# Altium PCB cnc_60X70_PCB.PcbDoc (part 1 of 2)
Units mil, origin at the board's own origin, x right, y up, seen from the top; angles counter-clockwise.
Board outline 3602.36 x 2362.2 mil, 2 copper layers (Top Layer, Bottom Layer); 111 components, 89 nets, 384 pads, 132 vias.
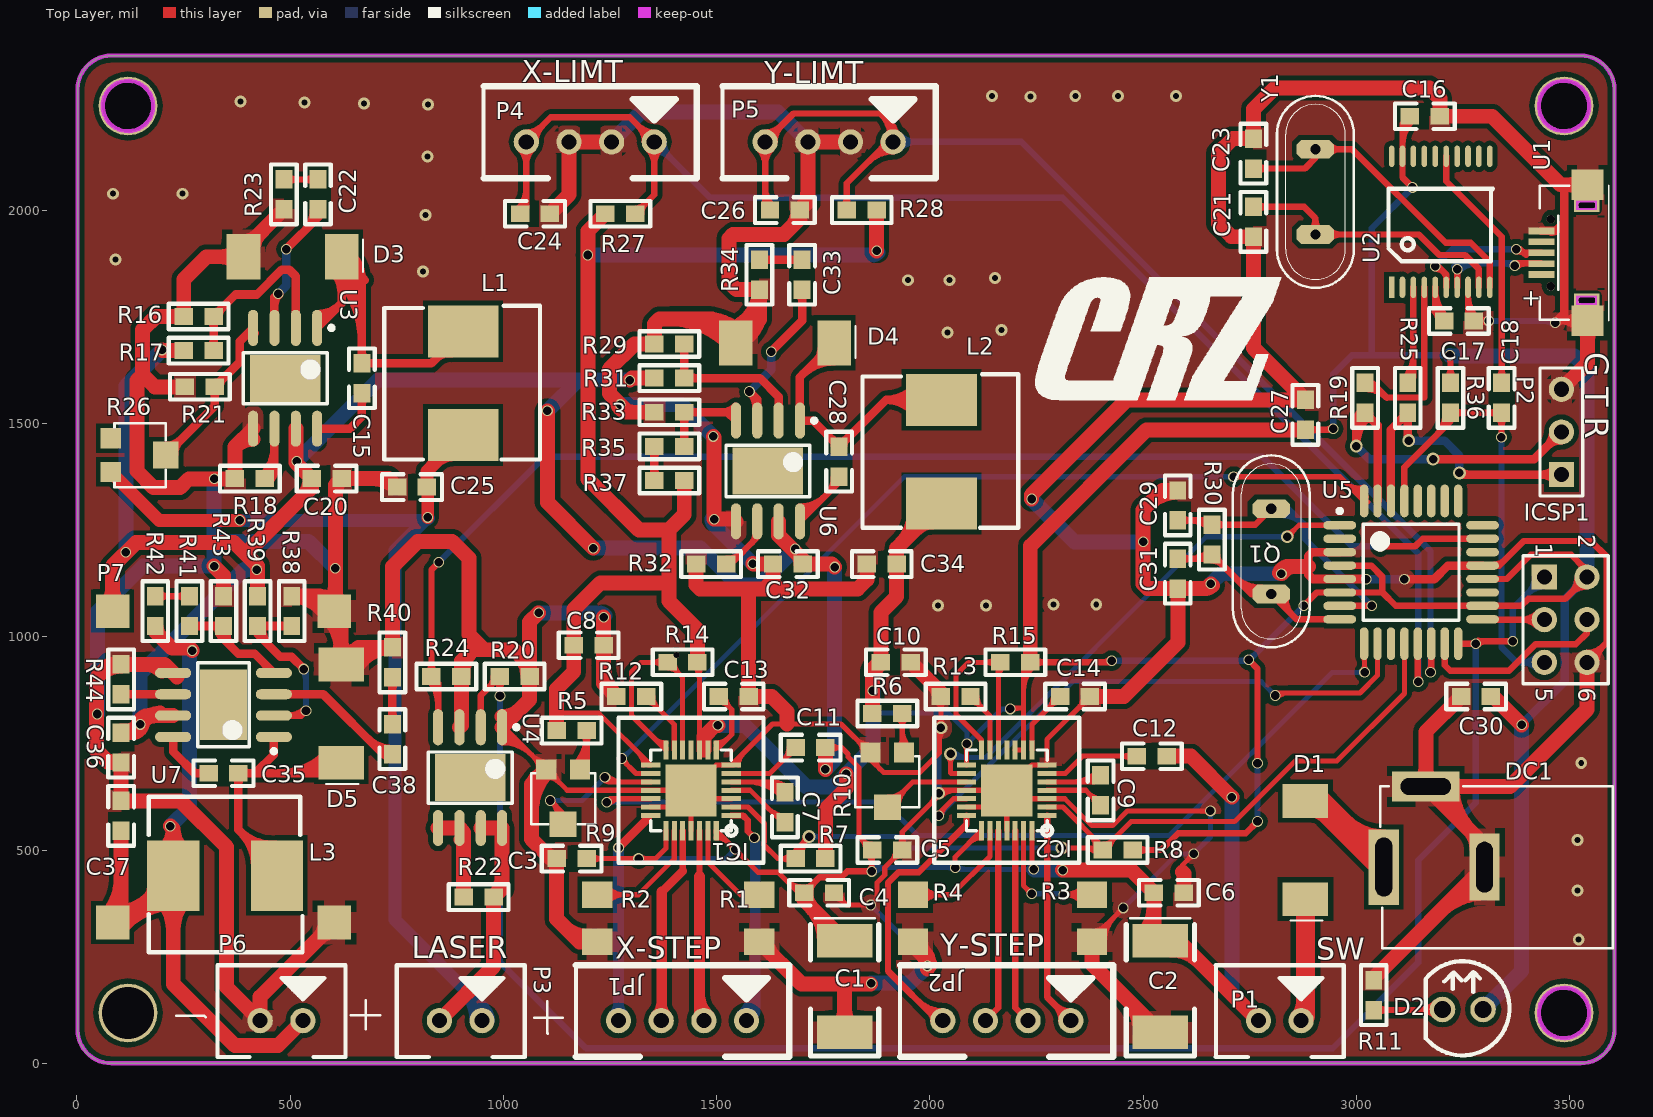
[diagram p0: Top Layer view]
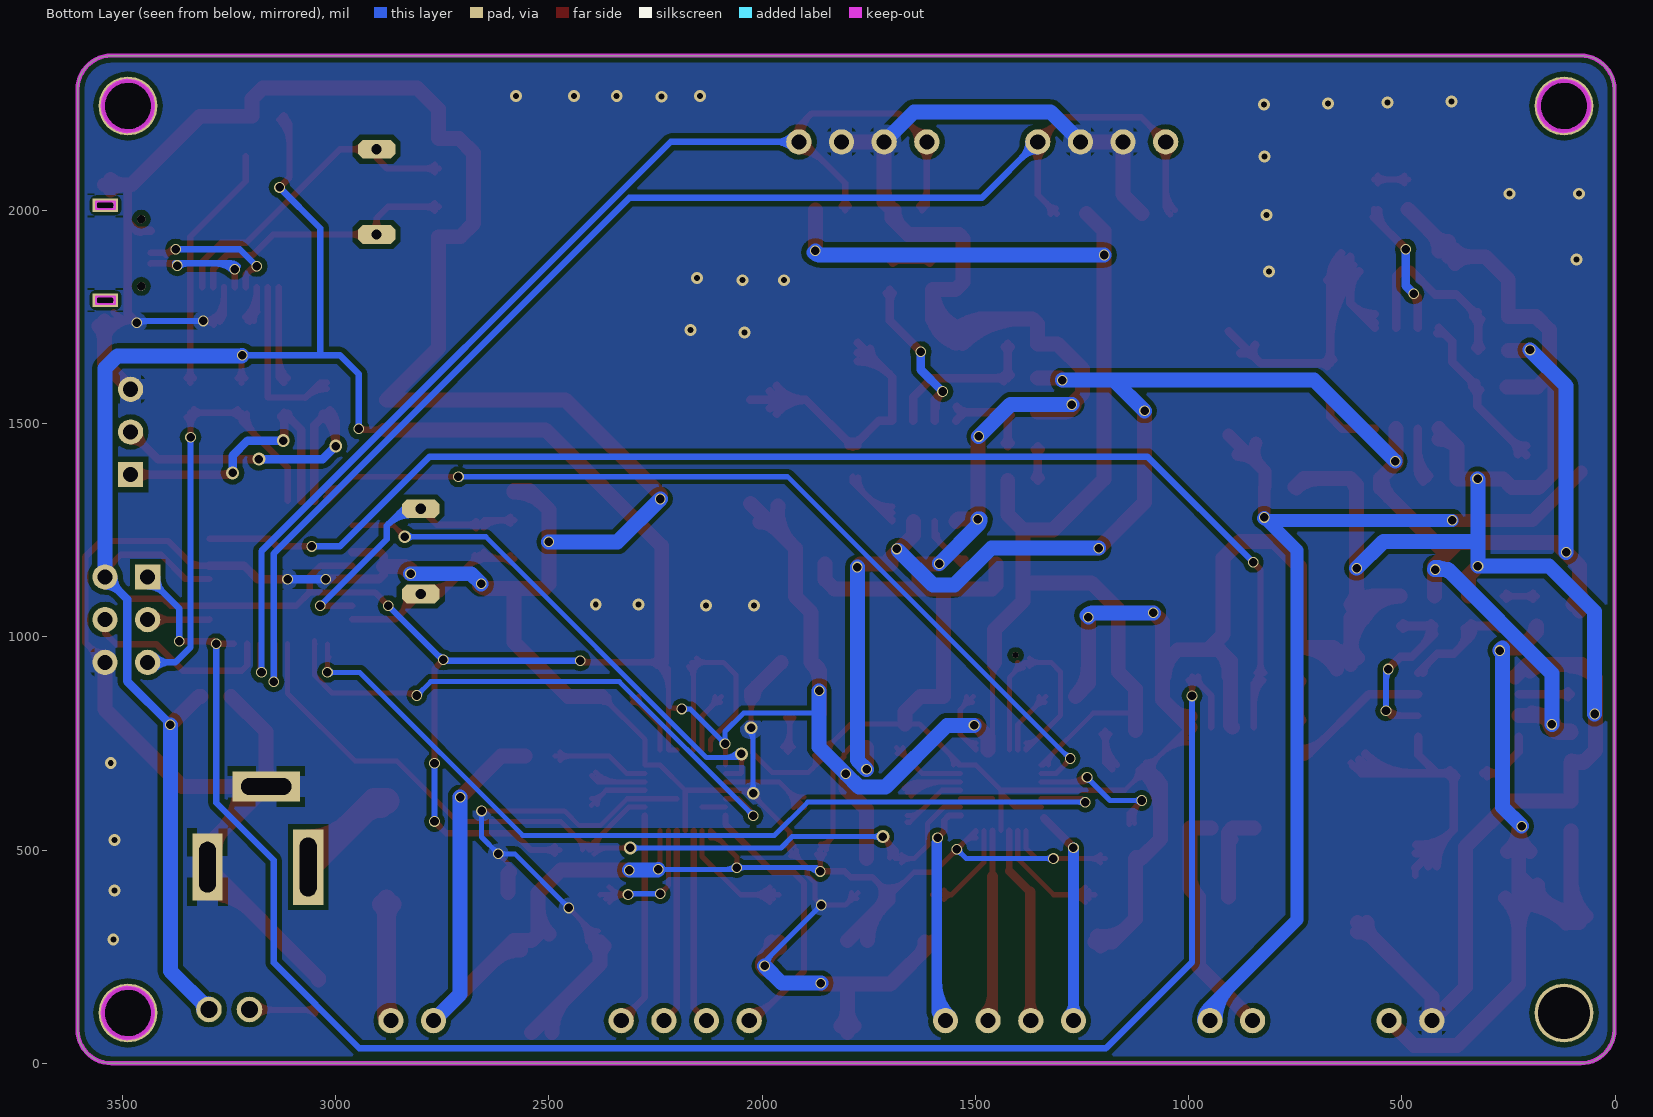
[diagram p1: Bottom Layer view, seen from below]

## Layer stack, top to bottom
Top Layer: signal copper 1.4
Dielectric: dielectric 12.6, FR-4, Dk 4.8
Bottom Layer: signal copper 1.4

## Board outline
1.97,78.74 ccw(c80.71,78.74) 80.71,0 3525.59,0 ccw(c3525.59,78.74) 3604.33,78.74 3604.33,2283.46 ccw(c3525.59,2283.46) 3525.59,2362.2 80.71,2362.2 ccw(c80.71,2283.46) 1.97,2283.46

## Design rules (kind name [scope] priority, off if disabled: settings)
Clearance [All] p1: gap=3.94
ComponentClearance [All] p1 off: gap=10 collisioncheckmode=3 verticalgap=10 showdistances=FALSE
FabricationTestpoint [(IsPad And (OnTopLayer Or OnBottomLayer))] p1: side=3 testpointundercomponent=TRUE minsize=40 maxsize=100 preferedsize=60 minholesize=0 maxholesize=40 preferedholesize=32 testpointgrid=1 allowsidetop=TRUE allowsidebottom=TRUE usegrid=TRUE gridtolerance=0.01
PlaneConnect [All] p1: planeconnectstyle=Relief reliefexpansion=20 reliefentries=4 reliefconductorwidth=50 reliefairgap=10
PolygonConnect [All] p1: connectstyle=Relief reliefconductorwidth=50 reliefentries=4 polygonreliefangle="90 Angle"
RoutingVias [All] p1: holewidth=20 width=25 viastyle="Through Hole" minholewidth=20 minwidth=25 maxholewidth=20 maxwidth=30
SilkToSilkClearance [All] p1: silktosilkclearance=1
SilkscreenOverComponentPads [All] p1: minsilkscreentomaskgap=10
SolderMaskExpansion [All] p1: expansion=4
Width Width_1 [InNetClass('POW')] p1: maxlimit=60 minlimit=12 preferedwidth=12
Width [All] p2: maxlimit=710 minlimit=12 preferedwidth=12
23 further rules are at their usual default settings.

## Components (designator, comment, footprint, x,y, rotation, side; value= is the part's Value field where it differs from the comment)
C1 "Cap Pol1" CD6032 1800,180 r270 top
C2 "Cap Pol1" CD6032 2540,180 r270 top
C3 "Cap" C0603 1160,480 r0 top
C4 "Cap" C0603 1740,400 r0 top
C5 "Cap" C0603 1900,500 r180 top
C6 "Cap" C0603 2560,400 r0 top
C7 "Cap" C0603 1660,600 r270 top
C8 "Cap" C0603 1200,980 r0 top
C9 "Cap" C0603 2400,640 r270 top
C10 "Cap" C0603 1920,940 r0 top
C11 "Cap" C0603 1720,740 r180 top
C12 "Cap" C0603 2520,720 r180 top
C13 "Cap" C0603 1540,860 r180 top
C14 "Cap" C0603 2340,860 r180 top
C15 "Cap" C0603 668.46,1605.79 r270 top
C16 "Cap" C0603 3160,2220 r180 top
C17 "Cap" C0603 3240,1740 r180 top
C18 "Cap" C0603 3340,1560 r270 top
C20 "50V" C0603 585.83,1370.63 r0 top
C21 "Cap" C0603 2758.15,1972.48 r90 top
C22 "Cap" C0603 565.51,2036.85 r90 top
C23 "Cap" C0603 2758.15,2132.48 r270 top
C24 "Cap" C0603 1074.13,1991.69 r0 top
C25 "Cap" C0603 785.83,1350.63 r180 top
C26 "Cap" C0603 1660,2000 r0 top
C27 "Cap" C0603 2880,1520 r270 top
C28 "Cap" C0603 1787.01,1410.24 r270 top
C29 "Cap" C0603 2580.91,1307.76 r90 top
C30 "Cap" C0603 3280,860 r0 top
C31 "Cap" C0603 2580.91,1147.76 r270 top
C32 "50V" C0603 1667.01,1170.24 r180 top
C33 "Cap" C0603 1700.16,1848.54 r90 top
C34 "Cap" C0603 1887.01,1170.24 r180 top
C35 "Cap" C0603 344.02,680.16 r180 top
C36 "50V" C0603 104.02,740.16 r270 top
C37 "Cap" C0603 104.02,580.16 r90 top
C38 "Cap" C0603 740,760 r90 top
D1 "1N5824" SS34 2880,500 r270 top
D2 "LED3" LED 3296.42,126.22 r180 top
D3 "1N5824" SS34 505.83,1890.63 r0 top
D4 "1N5824" SS34 1660.16,1688.54 r0 top
D5 "1N5824" SS34 620,820 r270 top
DC1 "DC插座" DC座 3300,460 r180 top
IC1 "A4988" QFN28ET 1440,640 r180 top
IC2 "A4988" QFN28ET 2180,640 r180 top
ICSP1 "Header 3X2" HDR2X3 3440,1140 r270 top
JP1 "X-OUT" XH-2.54-4 1420,100 r180 top
JP2 "Y-OUT" XH-2.54-4 2180,100 r180 top
L1 "Inductor" L_1584 905.83,1610.63 r90 top
L2 "Inductor" L_1584 2027.01,1450.24 r90 top
L3 "Inductor" L_1584 364.02,440.16 r0 top
P1 "Header 2" XH-2.54-2 2820,100 r180 top
P2 "SERIAL" HDR1X3 3480,1380 r90 top
P3 "LASER" XH-2.54-2 900,100 r180 top
P4 "X-LMT" XH-2.54-4 1203.7,2160 r180 top
P5 "Y-LMT" XH-2.54-4 1763.7,2160 r180 top
P6 "PRO-POW" XH-2.54-2 480,100 r180 top
P7 "PRO_POW_MODULE" mp1584module 84.02,1060.16 r270 top
Q1 "16MHz" QS 2800,1200 r90 top
R1 "Res2" 1206 1600,340 r270 top
R2 "Res2" 1206 1220,340 r270 top
R3 "Res2" 1206 2380,340 r270 top
R4 "Res2" 1206 1960,340 r270 top
R5 "Res2" R0603 1160,780 r180 top
R6 "Res2" R0603 1900,820 r180 top
R7 "Res1" R0603 1720,480 r0 top
R8 "Res1" R0603 2440,500 r0 top
R9 "RPot" 电位器 1140,560 r180 top
R10 "RPot" 电位器 1900,600 r180 top
R11 "Res3" R0603 3040,160 r90 top
R12 "Res2" R0603 1300,860 r0 top
R13 "Res2" R0603 2060,860 r0 top
R14 "Res2" R0603 1420,940 r0 top
R15 "Res2" R0603 2200,940 r0 top
R16 "Res1" R0603 285.83,1750.63 r0 top
R17 "Res1" R0603 285.83,1670.63 r0 top
R18 "Res1" R0603 405.83,1370.63 r0 top
R19 "Res2" R0603 3020,1560 r90 top
R20 "Res1" R0603 1026.46,906.65 r0 top
R21 "Res2" R0603 288.46,1585.79 r0 top
R22 "Res2" R0603 942.01,389.68 r180 top
R23 "Res1" R0603 485.51,2036.85 r90 top
R24 "Res1" R0603 866.46,906.65 r0 top
R25 "Res2" R0603 3120,1560 r270 top
R26 "RPot" 电位器 208.46,1425.79 r270 top
R27 "Res2" R0603 1274.13,1991.69 r180 top
R28 "Res2" R0603 1840,2000 r0 top
R29 "Res1" R0603 1389.06,1686.18 r0 top
R30 "Res2" R0603 2660.91,1227.76 r270 top
R31 "Res1" R0603 1389.06,1606.18 r0 top
R32 "Res1" R0603 1487.01,1170.24 r0 top
R33 "Res1" R0603 1389.06,1526.18 r0 top
R34 "Res1" R0603 1600.16,1848.54 r90 top
R35 "Res1" R0603 1389.06,1446.18 r0 top
R36 "Res2" R0603 3220,1560 r90 top
R37 "Res1" R0603 1389.06,1366.18 r180 top
R38 "Res1" R0603 504.02,1060.16 r270 top
R39 "Res1" R0603 424.02,1060.16 r270 top
R40 "Res1" R0603 740,940 r270 top
R41 "Res1" R0603 264.02,1060.16 r270 top
R42 "Res1" R0603 184.02,1060.16 r90 top
R43 "Res1" R0603 344.02,1060.16 r270 top
R44 "Res1" R0603 104.02,900.16 r270 top
U1 "USB" MICRO-USB 3520,1900 r90 top
U2 "CH340T" SSOP-20 3080,1820 r90 top
U3 "MP1584" SOIC127P720X170-8N 488.46,1605.79 r270 top
U4 "7341" SOIC127P720X170-8N 922.01,669.68 r270 top
U5 "ATMEGA328_20AU" TQFP32 3127.83,1151.02 r0 top
U6 "MP1584" SOIC127P720X170-8N 1620.16,1388.54 r270 top
U7 "MP1584" SOIC127P720X170-8N 344.02,840.16 r180 top
Y1 "12M" QS 2903.46,2042.76 r90 top

## Footprints (in the part's own frame and the unit in brackets; to place one, negate y for a bottom-side part, rotate by r counter-clockwise, add the part's x,y. Pads: shape width x height; smd on the part's side, far side on the other; paste and mask are expansions set on the pad)
1206 [mm]
  rect 1.6x1.8 smd: 1(-1.4,0) 2(1.4,0)
C0603 [mm]
  rect 1.1x1 smd: 1(-0.889,0) 2(0.889,0)
  silkscreen extent -1.78,-0.76 1.78,0.76
CD6032 [mm]
  rect 2x3.3 smd: 1(-2.73,0) 2(2.731,0)
  silkscreen extent -4.06,-2.03 4.13,2.03
DC座 [mm]
  rect 4x1.8 hole 1 slot 3 at 0 deg: 0(3.5,-4.8)
  rect 1.8x4 hole 1 slot 3 at 90 deg: 1(0,0)
  rect 1.8x4.5 hole 1 slot 3.5 at 90 deg: 2(6,0)
  silkscreen extent -7.62,-4.83 6.22,4.83
HDR1X3 [mm] "Connector; Header; 3 Position"
  rect 1.5x1.5 hole 0.9: 1(0,0)
  round 1.5 hole 0.9: 2(2.54,0) 3(5.08,0)
  silkscreen extent -1.27,-1.27 6.35,1.27
HDR2X3 [mm] "Connector; Header; 3x2 Position"
  rect 1.5x1.5 hole 0.9: 1(0,0)
  round 1.5 hole 0.9: 2(0,2.54) 3(2.54,0) 4(2.54,2.54) 5(5.08,0) 6(5.08,2.54)
  silkscreen extent -1.27,-1.27 6.35,3.81
L_1584 [mm]
  rect 3.1x4.2 smd: 1(-3.5,0) 2(2.667,0)
  silkscreen extent -4.95,-4.57 4.19,4.7
LED [mil]
  round 60 hole 40: 1(0,0) 2(95,0)
MICRO-USB [mm]
  rect 0.4x1.55 smd: 1(-1.3,2.2) 2(-0.65,2.2) 3(0,2.2) 4(0.65,2.2) 5(1.3,2.2)
  rect 1.8x1.9 smd: 6(-4.05,-0.55) 6(4.05,-0.55)
  rect 0.8x1.5 hole 0.4 slot 1 at 90 deg: 6(-2.825,-0.5) 6(2.825,-0.5)
  round 0.5 hole 0.5 unplated: ""(-2,1.65) ""(2,1.65)
  Keep-Out Layer lines w0.127: -3.054,0.075 -2.596,0.075 -2.596,-1.043 -3.054,-1.043 -3.054,0.075 ; 2.596,0.075 3.054,0.075 3.054,-1.043 2.596,-1.043 2.596,0.075
  silkscreen extent -4.05,-1.8 4,2.3
mp1584module [mm]
  rect 2x2 smd: 1(0,0) 2(18.542,0) 3(18.542,13.208) 4(0,13.208)
QFN28ET [mm]
  rect 1.15x0.3 smd: 1(-2.4,1.5) 2(-2.4,1) 3(-2.4,0.5) 4(-2.4,0) 5(-2.4,-0.5) 6(-2.4,-1) 7(-2.4,-1.5) 15(2.4,-1.5) 16(2.4,-1) 17(2.4,-0.5) 18(2.4,0) 19(2.4,0.5) 20(2.4,1) 21(2.4,1.5)
  rect 0.3x1.15 smd: 8(-1.5,-2.4) 9(-1,-2.4) 10(-0.5,-2.4) 11(0,-2.4) 12(0.5,-2.4) 13(1,-2.4) 14(1.5,-2.4) 22(1.5,2.4) 23(1,2.4) 24(0.5,2.4) 25(0,2.4) 26(-0.5,2.4) 27(-1,2.4) 28(-1.5,2.4)
  rect 3.048x3.099 smd: EXP(0,0)
  silkscreen extent -4.32,-4.32 4.32,4.32
QS [mil]
  oct 44x88 hole 24: 1(-100,0) 2(100,0)
  silkscreen extent -225,-90 225,90
R0603 [mm]
  rect 1.1x1 smd: 1(-0.889,0) 2(0.889,0)
  silkscreen extent -1.78,-0.76 1.78,0.76
SOIC127P720X170-8N [mm] "SOIC, 8-Leads, Body 5.0x2.6mm (max), Pitch 1.27mm, IPC Medium Density"
  rect 2.8x4.2 smd: 0(0,0)
  oval 2.15x0.6 smd: 1(-3,1.905) 2(-3,0.635) 3(-3,-0.635) 4(-3,-1.905) 5(3,-1.905) 6(3,-0.635) 7(3,0.635) 8(3,1.905)
  silkscreen extent -3.12,-2.5 1.53,2.88
SS34 [mm]
  rect 2x2.7 smd: 1(-2.921,0) 2(2.921,0)
  silkscreen extent 4.19,-0.89 4.19,1.02
SSOP-20 [mm]
  rect 1.27x0.33 smd: 1(-0.025,-0.051)
  oval 1.27x0.33 smd: 2(-0.025,-0.701) 3(-0.025,-1.351) 4(-0.025,-2.001) 5(-0.025,-2.651) 6(-0.025,-3.301) 7(-0.025,-3.951) 8(-0.025,-4.601) 9(-0.025,-5.251) 10(-0.025,-5.901) 11(7.775,-5.901) 12(7.775,-5.251) 13(7.775,-4.601) 14(7.775,-3.951) 15(7.775,-3.301) 16(7.775,-2.651) 17(7.775,-2.001) 18(7.775,-1.351) 19(7.775,-0.701) 20(7.775,-0.051)
  silkscreen extent 1.52,-6.1 5.84,0.13
TQFP32 [mm] "Thin QFP, 32-Leads, Body 7x7mm, Pitch 0.8mm, IPC Low Density"
  oval 1.95x0.5 smd: 1(-4.25,2.8) 2(-4.25,2) 3(-4.25,1.2) 4(-4.25,0.4) 5(-4.25,-0.4) 6(-4.25,-1.2) 7(-4.25,-2) 8(-4.25,-2.8) 17(4.25,-2.8) 18(4.25,-2) 19(4.25,-1.2) 20(4.25,-0.4) 21(4.25,0.4) 22(4.25,1.2) 23(4.25,2) 24(4.25,2.8)
  oval 0.5x1.95 smd: 9(-2.8,-4.25) 10(-2,-4.25) 11(-1.2,-4.25) 12(-0.4,-4.25) 13(0.4,-4.25) 14(1.2,-4.25) 15(2,-4.25) 16(2.8,-4.25) 25(2.8,4.25) 26(2,4.25) 27(1.2,4.25) 28(0.4,4.25) 29(-0.4,4.25) 30(-1.2,4.25) 31(-2,4.25) 32(-2.8,4.25)
  silkscreen extent -4.37,-2.85 2.85,3.77, body extent -3.5,-3.5 3.5,3.5, height 1.2
XH-2.54-2 [mm]
  round 1.5 hole 0.9: 1(-1.27,0) 2(1.27,0)
  silkscreen extent -3.81,-3.3 3.81,2.16
XH-2.54-4 [mm]
  round 1.5 hole 0.9: 1(-3.81,0) 2(-1.27,0) 3(1.27,0) 4(3.81,0)
  silkscreen extent -6.35,-3.3 6.35,2.16
电位器 [mm]
  rect 1.2x1.2 smd: 1(-1,-3.275) 2(1,-3.275)
  rect 1.6x1.524 smd: 3(0,0)
  silkscreen extent -1.91,-3.05 1.9,0

## Part data
C1 C2: "Polarized Capacitor (Radial)"
C3 C4 C5 C6 C7 C8 C9 C10 C11 C12 C13 C14 C15 C16 C17 C18 C21 C22 C23 C24 C25 C26 C27 C28 C29 C30 C31 C33 C34 C35 C37 C38: "Capacitor"
C20 C32 C36: library part Cap, "Capacitor"
D1 D3 D4 D5: library part "Diode 1N4007", "1 Amp General Purpose Rectifier"
D2: "Typical BLUE SiC LED"
ICSP1: "Header, 3-Pin, Dual row"
JP1 JP2 P4 P5 P7: library part "Header 4", "Header, 4-Pin"
P1: "Header, 2-Pin"
P2: library part "Header 3", "Header, 3-Pin"
P3 P6: library part "Header 2", "Header, 2-Pin"
Q1: library part XTAL/S
R1 R2 R3 R4 R5 R6 R7 R8 R11 R12 R13 R14 R15 R16 R17 R18 R19 R20 R21 R22 R23 R24 R25 R27 R28 R29 R30 R31 R32 R33 R34 R35 R36 R37 R38 R39 R40 R41 R42 R43 R44: "Resistor"
R9 R10 R26: "Potentiometer"
U1: library part MOLEX_MICRO_USB_AB_BOTTOM_MOUNT
U4: library part Component_1
U5: library part ATMEGA8_TQFP32, "Atmel Microcontroller - Library created by carel..  <www.mpfreezone.com>"
Y1: library part XTAL, "Crystal Oscillator"

## Free pads (board coordinates)
  round 137.8 hole 122.05: 0(120.08,2244.1) 1(3486.22,2244.1) 2(3486.22,118.11) 3(120.08,118.11)

## Via types
v1: diameter 25, hole 20, Top Layer to Bottom Layer, 93 vias
v2: diameter 28, hole 14, Top Layer to Bottom Layer, 28 vias
v3: diameter 30, hole 20, Top Layer to Bottom Layer, 10 vias
v4: diameter 14, hole 14, Top Layer to Bottom Layer, 1 vias

## Nets (pads, with @x,y where several pads share a name; then routed paths per layer and width w, separated by ;. In a path a pad name is that pad's centre, name@x,y a point inside that pad or via, vN(x,y) a via of type N, cw(c..) or ccw(c..) an arc to the next point about the centre after c; other vN are vias at no path point)
D+: U1.3 U2.6 | length 401.2
  Top Layer w15: v1@3184.06,1863.11 cw(c3184.06,1834.41) 3204.35,1854.7 ; v1(3184.06,1868.11) 3190.94,1868.11 3209.95,1849.1 U2.6@3209.95,1819 ; 3203.47,1855.59 cw(c3185.38,1837.51) U2.6@3210.96,1837.51 ; v1(3374.02,1908.46) 3383.86,1908.46 3392.32,1900 U1.3@3433.38,1900 ; v1@3374.42,1903.48 cw(c3376.74,1874.57) 3397.24,1895.08
  Bottom Layer w15: v1(3184.06,1868.11) 3224.41,1908.46 v1(3374.02,1908.46)
D-: U1.2 U2.7 | length 380.6
  Top Layer w15: U2.7@3235.54,1819 3235.54,1860.54 v1(3236.22,1861.22) ; 3235.54,1847.51 cw(c3249.93,1847.51) v1@3239.76,1857.68 ; v1(3371.06,1870.08) 3375.98,1875 3432.79,1875 U1.2@3433.38,1874.41 ; v1@3374.6,1866.54 cw(c3395.02,1846.13) 3395.02,1875
  Bottom Layer w15: v1@3229.15,1868.29 cw(c3245.34,1852.1) 3245.34,1875 ; v1(3236.22,1861.22) 3250,1875 3375.98,1875 v1(3371.06,1870.08) ; v1@3239.76,1857.68 cw(c3281.56,1815.88) 3281.56,1875 ; 3347.11,1875 cw(c3347.11,1846.13) v1@3367.53,1866.54
DIR-LASER: ICSP1.3 U5.17 | length 228.7
  Top Layer w15: U5.17@3295.16,1040.79 3295.94,1040 ICSP1.3@3440,1040 ; ICSP1.3@3424.42,1024.43 ccw(c3386.82,986.82) 3386.82,1040 ccw(c3386.82,1093.18) ICSP1.3@3424.42,1055.58
EN-LASER: ICSP1.1 R20.1 U4.2 U5.16 | length 4442.1
  Top Layer w15: U4.2@947.01,787.79 947.01,862.2 R20.1@991.46,906.65 992.13,905.98 v1(992.13,861.22) ; 967.3,882.49 ccw(c943.13,906.65) R20.1@977.3,906.65 ; R20.1@972.05,887.24 cw(c989.49,869.8) R20.1@989.49,894.47 ; R20.1@982.84,898.04 cw(c960.42,875.62) 992.13,875.62 ; 992.13,878.85 cw(c1019.26,878.85) R20.1@1000.07,898.04 ; U5.16@3238.07,983.7 v1(3278.98,983.7) 3285.43,990.16 3286.42,989.17 v1(3366.14,989.17) ; v1@3282.51,980.17 cw(c3304.26,958.42) 3304.26,989.17
  Bottom Layer w15: v1(992.13,861.22) 992.13,237.2 1193.9,35.43 2943.9,35.43 3144.68,236.22 3144.68,476.38 3278.98,610.67 v1(3278.98,983.7) ; v1(3366.14,989.17) 3366.14,1066.14 ICSP1.1@3440,1140 ; ICSP1.1@3417.97,1140 cw(c3364.79,1140) 3402.4,1102.4 cw(c3440,1064.79) ICSP1.1@3440,1117.97
EN-STEP: IC1.2 IC2.2 R7.1 R8.1 U5.12 | length 2595.1
  Top Layer w12: IC1.2@1534.48,600.63 1573.58,600.63 1612.08,562.13 1612.08,518.81 1611.22,517.95 1611.22,511.81 1643.03,480 R7.1@1685,480 1685,498.97 v3@1716.62,530.6 ; R7.1@1673.35,470.32 ccw(c1649.99,446.96) 1649.99,480 ccw(c1649.99,513.04) R7.1@1673.35,489.68 ; R7.1@1688.63,480.24 cw(c1727.49,485.93) 1699.72,513.7 ; R7.1@1700.51,481.98 cw(c1756.96,490.25) v3@1716.62,530.59 ; 1700.6,514.58 ccw(c1683.65,531.52) v3@1707.62,531.52 ; 1702.84,516.81 cw(c1716.62,503.03) v3@1716.62,522.52 ; v3(1716.62,531.52) v3@1716.62,530.6 ; IC2.2@2274.48,600.63 2311.77,600.63 R8.1@2405,507.4 ; v3(2309.06,504.92) 2402.52,504.92 R8.1@2405,507.4 ; v3@2315.42,498.56 cw(c2330.78,483.19) 2330.78,504.92 cw(c2330.78,526.65) v3@2315.42,511.29 ; 2358.12,504.92 cw(c2358.12,455.09) R8.1@2393.36,490.32 ; 2373.05,539.36 cw(c2333.69,500) R8.1@2389.35,500 ; 2381.87,504.92 ccw(c2381.87,521.16) R8.1@2393.36,509.68 ; R8.1@2393.53,518.87 cw(c2374.66,500) R8.1@2401.35,500 ; R8.1@2406.97,513.69 ccw(c2406.97,541.97) 2426.97,521.97 ; R8.1@2420.65,500 cw(c2458.44,500) 2431.72,526.72 ; U5.12@3112.09,983.7 3112.09,867.01 2953.74,708.66 2856.3,708.66 2714.1,566.46 2471.46,566.46 R8.1@2405,500 R8.1@2405,507.4
  Bottom Layer w12: v3(1716.62,531.52) 1929.11,531.52 1955.71,504.92 v3(2309.06,504.92) ; v3@1722.98,525.16 cw(c1738.35,509.79) 1738.35,531.52 cw(c1738.35,553.25) v3@1722.98,537.89 ; v3@2302.69,498.56 ccw(c2287.33,483.19) 2287.33,504.92 ccw(c2287.33,526.65) v3@2302.69,511.29
EXT-A6: U5.19
EXT-A7: U5.22
GND: C1.2 C2.2 C3.1 C4.2 C5.1 C6.2 C8.2 C10.2 C13.1 C14.1 C16.1 C17.1 C20.2 C21.1 C23.1 C24.2 C25.2 C26.2 C27.1 C29.2 C30.1 C31.2 C32.2 C34.2 C36.2 C37.2 D3.1 D4.1 D5.1 DC1.0 DC1.1 IC1.3 IC1.7 IC1.18 IC1.20 IC1.25 IC1.EXP IC2.3 IC2.7 IC2.18 IC2.20 IC2.25 IC2.EXP ICSP1.6 P2.3 P4.2 P4.3 P5.2 P5.3 P6.2 P7.3 P7.4 R1.2 R2.2 R3.2 R4.2 R9.2 R10.2 R11.2 R12.1 R13.1 R16.1 R18.1 R20.2 R21.1 R23.1 R24.2 R29.1 R32.1 R33.1 R34.1 R38.1 R40.1 R43.1 R44.1 U1.5 U1.6 U2.8 U3.5 U4.1 U4.3 U5.3 U5.5 U5.21 U6.5 U7.5 | length 28994.3
  Top Layer w12: U4.1@997.01,751.47 cw(c997.01,652.27) 1067.15,722.42 ; U4.1@997.01,763.47 cw(c997.01,693.24) 1046.66,742.9 ; U4.1@997.01,775.47 cw(c997.01,734.21) 1026.18,763.39 ; U4.1@997.01,787.47 cw(c997.01,775.19) U4.1@1005.69,783.87 ; U4.1@997.01,787.79 1001.77,787.79 R9.2@1100.63,688.94 1149.57,640 IC1.18@1345.51,640 IC1.EXP@1440,640 ; R9.2@1083.01,688.94 ccw(c1040.46,688.94) 1070.55,719.02 ccw(c1100.63,749.1) R9.2@1100.63,706.56 ; R9.2@1100.63,671.32 cw(c1100.63,628.77) 1130.71,658.85 cw(c1160.79,688.94) R9.2@1118.25,688.94 ; IC1.20@1345.51,600.63 1406.77,600.63 IC1.EXP@1440,633.86 ; IC1.25@1440,545.51 IC1.EXP@1440,633.86 ; IC1.EXP@1459.68,620.32 IC1.3@1534.48,620.32 ; IC1.7@1539.12,699.06 cw(c1550.32,699.06) 1542.4,706.97 ; IC1.7@1551.12,699.06 cw(c1591.29,699.06) 1562.88,727.46 ; C4.2@1775,400 1803.94,371.06 v1(1861.22,371.06) 1875.72,385.56 1875.72,423.53 1893.91,441.73 1893.91,458.91 C5.1@1935,500 1935,542.28 2020.77,628.05 v3(2020.77,632.9) 2020.77,638.88 2021.89,640 IC2.18@2085.51,640 IC2.EXP@2180,640 ; C4.2@1776.97,386.31 cw(c1776.97,358.03) 1796.97,378.03 ; C4.2@1790.65,400 ccw(c1828.44,400) 1801.72,373.28 ; 1825.51,761.11 ccw(c1860.63,796.23) R10.2@1860.63,746.56 ; 1832.63,753.98 cw(c1807.59,728.94) R10.2@1843.01,728.94 ; v1@1856.62,366.47 ccw(c1845.53,355.37) 1845.53,371.06 ccw(c1845.53,386.76) v1@1856.62,375.66 ; R10.2@1865.75,726.62 ccw(c1885.21,717.82) 1870.11,702.72 ; R10.2@1876.69,721.68 ccw(c1902.11,710.18) 1882.38,690.45 ; 1908.28,473.28 ccw(c1881.55,500) C5.1@1919.35,500 ; 1913.03,478.03 cw(c1933.03,458.03) C5.1@1933.03,486.31 ; C5.1@1925.32,509.68 ccw(c1901.96,533.04) 1935,533.04 ccw(c1968.04,533.04) C5.1@1944.68,509.68 ; 2001.97,609.26 ccw(c1978.32,632.9) v3@2011.77,632.9 ; R13.1@2015.32,850.32 cw(c1990.53,825.53) 2025.59,825.53 ; v3@2019.23,792.78 ccw(c2003.86,808.15) 2025.59,808.15 ccw(c2047.32,808.15) v3@2031.95,792.78 ; 2022.23,756.57 cw(c2055.44,756.57) v3@2031.95,780.05 ; v3@2022.23,783.06 2022.23,727.94 1976.38,682.09 1890.75,682.09 1860.63,712.21 R10.2@1860.63,728.94 1857.68,728.94 1791.34,795.28 1664.37,795.28 1630.7,795.28 IC1.7@1534.48,699.06 1499.06,699.06 IC1.EXP@1440,640 ; R13.1@2025,860 2025.59,859.41 v3(2025.59,786.42) ; 2025.59,828.39 cw(c2056.61,828.39) R13.1@2034.68,850.32 ; v3@2027.13,626.54 cw(c2059.62,594.05) 2059.62,640 ; IC2.20@2085.51,600.63 IC2.EXP@2140.63,600.63 ; IC2.25@2180,545.51 IC2.EXP@2180,640 ; IC2.EXP@2199.68,620.32 IC2.3@2274.48,620.32 2316.13,620.32 2379.36,557.09 2428.15,557.09 2462.6,591.54 v1(2657.48,591.54) ; 2348.28,833.28 ccw(c2321.56,860) C14.1@2359.35,860 ; 2353.03,838.03 cw(c2373.03,818.03) C14.1@2373.03,846.32 ; C14.1@2375,860 2274.48,759.48 IC2.7@2274.48,699.06 2239.06,699.06 IC2.EXP@2180,640 ; R3.2@2380,284.88 2380,291.42 v1(2452.76,364.17) ; R3.2@2383.94,310.38 ccw(c2383.94,346.66) 2409.59,321 ; R3.2@2397.43,284.88 cw(c2455.29,284.88) 2414.38,325.8 ; R3.2@2409.43,284.88 cw(c2496.26,284.88) 2434.86,346.28 ; v1@2446.26,364.17 cw(c2430.56,364.17) 2441.66,353.08 cw(c2452.76,341.98) v1@2452.76,357.67 ; 2591.54,448.82 2591.54,464.57 v1(2618.11,491.14) ; v1@2611.61,491.14 cw(c2595.92,491.14) 2607.01,480.05 cw(c2618.11,468.95) v1@2618.11,484.64 ; v1@2652.88,586.94 ccw(c2641.79,575.84) 2641.79,591.54 ccw(c2641.79,607.23) v1@2652.88,596.13 ; IC1.EXP@1440,633.86 IC1.EXP@1440,640
  Top Layer w15: 3261.13,1761.93 ccw(c3294.96,1761.93) C17.1@3271.04,1738.01 ; U2.8@3261.13,1798.14 ccw(c3331.18,1798.14) C17.1@3281.65,1748.62 ; U2.8@3261.13,1819 3261.13,1753.87 C17.1@3275,1740 3309.88,1740 v1(3310.04,1740.16) ; C17.1@3285.59,1731.38 cw(c3306.39,1710.58) 3306.39,1740 cw(c3306.39,1769.42) C17.1@3285.59,1748.62 ; U5.21@3295.16,1166.77 3334.09,1166.77 3391.73,1224.41 3549.21,1224.41 3586.83,1186.79 3586.83,986.83 ICSP1.6@3540,940 ; U5.21@3323.7,1169.11 ccw(c3323.7,1199.86) 3345.44,1178.12 ; v1(3465.55,1736.22) 3469.88,1740.55 U1.6@3541.65,1740.55 ; v1@3469.09,1732.68 cw(c3488.08,1713.69) 3488.08,1740.55 ; U1.6@3519.93,1720.8 ccw(c3472.25,1673.12) 3472.25,1740.55 ccw(c3472.25,1807.99) U1.6@3519.93,1760.3 ; ICSP1.6@3540,962.03 ccw(c3540,1015.21) 3577.6,977.6 ccw(c3615.21,940) ICSP1.6@3562.03,940
  Top Layer w20: U5.3@2960.51,1198.27 2896.1,1198.27 2886.81,1188.98 2886.81,1164.37 2886.81,1145.67 2897.2,1135.28 U5.5@2960.51,1135.28 3022.2,1135.28 v1(3022.64,1134.84) ; v1(3112.2,1134.84) 3182.09,1134.84 3214.02,1166.77 U5.21@3295.16,1166.77 ; U1.5@3433.38,1951.18 3466.3,1951.18 3486.22,1971.1 ; U1.5@3456.02,1949.05 ccw(c3456.02,1968.73) 3469.94,1954.82 ; v1@3469.88,1740.55 3486.22,1756.89 3486.22,1971.1 ; 3486.22,2052.17 3486.22,1971.1
  Top Layer w35: 52.3,909.59 cw(c104.01,857.87) R44.1@104.01,931.01 ; 62.07,717.46 ccw(c88.89,744.28) C36.2@103.19,709.15 ; 64.81,922.09 cw(c93.94,892.96) R44.1@103.51,933.03 ; 160.84,935.16 cw(c160.84,880.6) U7.5@199.42,919.18 ; U7.5@225.9,915.16 205.9,935.16 R44.1@104.01,935.16 77.88,935.16 46.26,903.54 46.26,733.27 74.37,705.16 C36.2@104.02,705.16 C37.2@104.01,615.16 243.11,615.16 351.38,506.89 351.38,178.62 P6.2@430,100 430,156.14 P7.3@604.02,330.16 ; U7.5@234.71,906.35 cw(c234.13,905.76) U7.5@234.93,905.56 ; R21.1@253.47,1585.79 182.91,1585.79 154.53,1614.17 ; v1(321.85,1165.35) 344.01,1143.19 R43.1@344.01,1095.16 ; R18.1@370.28,1370.08 v1(322.83,1370.08) 262.8,1370.08 242.13,1349.41 180.12,1349.41 140.75,1388.78 140.75,1600.39 154.53,1614.17 ; R18.1@370.83,1370.63 370.83,1445.04 U3.5@413.46,1487.68 ; 371.09,1445.3 cw(c413.46,1402.93) U3.5@413.46,1462.85 ; D3.1@375.36,1875.16 ccw(c338.03,1837.83) 338.03,1890.63 ccw(c338.03,1943.43) D3.1@375.36,1906.09 ; D3.1@390.83,1926.28 ccw(c390.83,1972.42) D3.1@423.46,1939.79 ; D3.1@412.7,1904.41 cw(c472.15,1904.41) 430.11,1946.45 ; R23.1@485.51,2001.85 390.83,1907.17 D3.1@390.83,1890.63 304.02,1890.63 250.83,1837.44 R16.1@250.83,1750.63 185.67,1750.63 154.53,1719.49 154.53,1614.17 ; P7.4@565.56,1095.16 cw(c565.56,1037.28) P7.4@615.3,1066.87 ; P7.3@582.15,330.16 cw(c529.35,330.16) 566.68,292.82 cw(c604.02,255.49) P7.3@604.02,308.29 ; P7.4@585.22,1048.98 ccw(c504.02,1000.68) R38.1@504.01,1095.16 569.01,1095.16 P7.4@604.02,1060.16 ; P7.4@588.55,1044.69 cw(c512.63,968.77) D5.1@620,968.77 ; P7.4@588.55,1075.62 ccw(c545.71,1118.47) 606.3,1118.47 ; D5.1@604.53,950.47 ccw(c567.2,987.8) 620,987.8 ccw(c672.8,987.8) D5.1@635.46,950.47 ; 606.3,1107.45 ccw(c651.31,1107.45) P7.4@619.48,1075.62 ; 606.3,1335.04 cw(c654.45,1335.04) C20.2@620.4,1369.09 ; D5.1@622.36,941.48 cw(c679.91,908.84) 679.91,975 ; D5.1@652.8,924.21 cw(c739.99,874.76) R40.1@740,975 ; D5.1@653.9,943.57 cw(c680.23,954.77) 660,975 ; 695.3,1370.63 cw(c695.3,1297.07) C25.2@747.31,1349.09 ; C25.2@750.83,1350.63 730.83,1370.63 C20.2@620.83,1370.63 606.3,1356.1 v1(606.3,1160.43) 606.3,1062.44 P7.4@604.02,1060.16 ; U4.3@897.01,787.79 901.46,792.24 R24.2@901.46,906.65 901.46,942.8 928.15,969.49 ; R24.2@905.6,906.86 cw(c983.42,914.22) 928.15,969.49 ; U4.1@997.01,787.79 1061.46,852.24 R20.2@1061.46,906.65 ; U4.1@997.01,812.62 ccw(c997.01,872.54) 1039.38,830.17 ; 1035.3,959.78 cw(c982.17,906.65) R20.2@1057.3,906.65 ; 1065.94,590.42 cw(c1199.14,590.42) R9.2@1104.96,684.61 ; 1065.94,639.89 cw(c1109.7,639.89) R9.2@1101.74,682.92 ; v1(1082.68,1056.1) 1061.46,1034.88 R20.2@1061.46,906.65 ; 1099.67,491.86 ccw(c1123.03,515.22) C3.1@1123.03,482.19 ; R9.2@1100.63,688.94 1065.94,654.25 1065.94,525.59 1111.53,480 C3.1@1125,480 1125,338.58 1178.7,284.88 R2.2@1220,284.88 ; C24.2@1109.13,1991.69 1153.7,2036.26 P4.3@1153.7,2160 P4.2@1253.7,2160 ; 1143.68,319.9 ccw(c1198.53,374.74) R2.2@1213.38,298.62 ; R2.2@1206.17,274.98 ccw(c1182.27,251.09) 1182.27,284.88 ccw(c1182.27,318.67) R2.2@1206.17,294.78 ; 1235,932.95 ccw(c1335.97,932.95) R12.1@1264.58,861.55 ; v1(1235,1046.02) C8.2@1235,980 1235,890 R12.1@1265,860 ; v1@1268.96,1542.5 ccw(c1292.72,1551.64) 1292.72,1526.18 ; v1@1270.09,1540.76 ccw(c1305.27,1575.94) 1305.27,1526.18 ; R33.1@1354.06,1526.18 1292.72,1526.18 ; 1389.14,1745.08 cw(c1389.14,1546.3) D4.1@1529.69,1686.86 ; R32.1@1452.01,1170.24 1452.01,1120.83 1460.63,1112.2 1575.79,1112.2 ; 1473.63,1745.08 cw(c1473.63,1630.8) D4.1@1554.44,1711.61 ; v1(1492.13,1469.49) 1494.09,1467.52 v1(1494.09,1275.59) 1540,1275.59 U6.5@1545.16,1270.43 ; 1495.51,1738.19 ccw(c1532.11,1774.79) D4.1@1541.28,1723.85 ; D4.1@1537.43,1722.78 ccw(c1503.14,1813.54) R34.1@1600.16,1813.54 ; D4.1@1547,1724.11 ccw(c1552.67,1791.03) 1600.16,1743.54 ; D4.1@1549.8,1690.04 ccw(c1522.27,1762.9) 1600.16,1762.9 ; v1(1584.65,1171.26) 1585.67,1170.24 C32.2@1632.01,1170.24 1632.01,1132.99 1611.22,1112.2 ; R1.2@1600,284.88 1698.86,186.02 v1@1860.24,186.02 ; R1.2@1617.93,284.88 ccw(c1661.23,284.88) R1.2@1630.61,254.27 ; 1664.37,795.28 1664.37,824.8 1629.17,860 C13.1@1575,860 1575,1111.42 1575.79,1112.2 ; 1674.08,1959.51 ccw(c1633.58,2000) C26.2@1690.85,2000 ; C26.2@1695.42,2001.54 ccw(c1651.3,2045.67) 1713.7,2045.67 ; C1.2@1784.54,87.96 ccw(c1747.2,125.3) 1800,125.3 ccw(c1852.8,125.3) C1.2@1815.47,87.96 ; C1.2@1800,72.5 1800,185.24 ; P5.2@1813.7,2160 P5.3@1713.7,2160 1713.7,2018.7 C26.2@1695,2000 1695,1980.43 1657.48,1942.91 1538.39,1942.91 1528.54,1933.07 1528.54,1831.69 1546.69,1813.54 R34.1@1600.16,1813.54 1600.16,1743.55 ; C34.2@1852.01,1170.24 1852.01,1133.5 1830.71,1112.2 1611.22,1112.2 ; C10.2@1955,940 2025,870 R13.1@2025,860 ; R4.2@1958.95,271.8 cw(c1939.52,220.81) v1@1994.09,220.81 ; R4.2@1960,284.88 1994.09,250.79 v1(1994.09,228.35) ; R4.2@1963.51,270.89 cw(c1962.55,239.36) v1@1994.09,239.36 ; R4.2@1977.93,284.88 ccw(c2021.23,284.88) R4.2@1990.61,254.27 ; R4.2@1986.76,258.12 cw(c1956.99,228.35) v1@1999.09,228.35 ; 2010.83,884.17 cw(c1986.67,860) R13.1@2020.85,860 ; v1(2238.19,1322.83) 2238.19,1332.68 2460.51,1555 C27.1@2880,1555 2758.15,1676.85 C21.1@2758.15,1937.48 2707.21,1937.48 2676.18,1968.5 2676.18,2133.86 2709.8,2167.48 C23.1@2758.15,2167.48 2758.15,2236.5 2807.95,2286.3 3170.39,2286.3 3195,2261.69 C16.1@3195,2220 3317.4,2220 3477.95,2059.45 U1.6@3541.65,2059.45 ; R3.2@2370.1,274.99 cw(c2346.21,251.09) 2380,251.09 cw(c2413.79,251.09) R3.2@2389.9,274.99 ; C14.1@2375,860 2454.49,860 2580.9,986.42 C31.2@2580.9,1112.76 ; R3.2@2380,284.88 2380,232.5 C2.2@2540,72.5 ; 2458.98,153.52 cw(c2377.96,72.5) C2.2@2492.54,72.5 ; 2511.71,1309.94 cw(c2580.9,1240.75) C29.2@2580.9,1338.6 ; 2526.34,1324.57 cw(c2568.19,1282.72) C29.2@2580.45,1340.62 ; C29.2@2580.9,1342.76 2544.53,1342.76 2499.02,1297.24 2499.02,1124.02 2510.27,1112.76 C31.2@2580.9,1112.76 ; 2591.54,448.82 2595,445.36 C6.2@2595,400 ; 2643.36,1112.76 ccw(c2643.36,1139.12) v1@2662,1120.48 ; v1(2658.46,1124.02) 2647.21,1112.76 C31.2@2580.9,1112.76 ; v1@2819.12,1149.34 cw(c2840.55,1141.57) 2840.55,1164.37 ; v1@2820.28,1151.17 cw(c2852.14,1119.31) 2852.14,1164.37 ; v1(2823.82,1147.64) 2840.55,1164.37 ; 2886.81,1164.37 2840.55,1164.37 ; R11.2@3040,195 3040,200 DC1.1@3300,460 3300,511.18 DC1.0@3162.2,648.98 ; DC1.0@3149.52,661.66 ccw(c3118.91,692.27) 3162.2,692.27 ccw(c3205.5,692.27) DC1.0@3174.89,661.66 ; DC1.0@3188.44,648.98 ccw(c3251.79,648.98) 3207,604.18 ; 3195.46,355.46 cw(c3300,250.91) DC1.1@3300,398.76 ; DC1.0@3218.19,636.29 cw(c3248.81,605.68) 3248.81,648.98 cw(c3248.81,692.27) DC1.0@3218.19,661.66 ; DC1.0@3223.44,648.98 ccw(c3371.29,648.98) 3266.75,544.43 ; C30.1@3245,860 3162.2,777.2 DC1.0@3162.2,648.98 ; 3255.21,415.2 cw(c3300,370.41) DC1.1@3300,433.76 ; 3263.82,547.36 cw(c3219.77,503.31) DC1.1@3282.07,503.31 ; P2.3@3480,1580 3541.65,1641.66 U1.6@3541.65,1740.55 ; U1.6@3527.01,2046.77 ccw(c3496.39,2016.16) 3496.39,2059.45 ccw(c3496.39,2102.74) U1.6@3527.01,2072.13 ; U1.6@3528.97,1727.87 cw(c3498.36,1697.26) 3541.65,1697.26 cw(c3584.95,1697.26) U1.6@3554.34,1727.87 ; ICSP1.6@3540,940 3540,829.37 3359.61,648.98 DC1.0@3162.2,648.98 ; P7.4@604.02,1060.16 620,1044.18 D5.1@620,935 660,975 ; 660,975 R40.1@740,975 ; R40.1@740,975 740,1164.21 799.21,1223.43 879.92,1223.43 919.29,1184.06 919.29,1004.92 954.72,969.49 ; 928.15,969.49 954.72,969.49 ; 954.72,969.49 1025.59,969.49 1061.46,933.62 R20.2@1061.46,906.65 ; 1292.72,1526.18 1249.02,1569.88 1249.02,1627.95 1307.24,1686.18 R29.1@1354.06,1686.18 1354.06,1732.99 1366.14,1745.08 1488.62,1745.08 D4.1@1545.16,1688.54 1600.16,1743.55 ; 1575.79,1112.2 1611.22,1112.2
  Bottom Layer w12: v1@1861.22,364.56 cw(c1861.22,348.87) 1872.32,359.97 cw(c1883.41,371.06) v1@1867.72,371.06 ; v1(1861.22,371.06) 1994.09,238.19 v1(1994.09,228.35) ; 1976.04,256.24 cw(c1948.14,228.35) v1@1987.59,228.35 ; v3@2014.4,639.27 ccw(c1999.04,654.63) 2020.77,654.63 ccw(c2042.5,654.63) v3@2027.13,639.27 ; v3(2020.77,632.9) v3@2020.77,781.59 ; 2020.77,753.05 cw(c2058.96,753.05) v3@2031.95,780.05 ; v1(2452.76,364.17) 2579.72,491.14 v1(2618.11,491.14) 2657.48,530.51 v1(2657.48,591.54) ; v1@2452.76,370.67 ccw(c2452.76,386.37) 2463.85,375.27 ccw(c2474.95,364.17) v1@2459.26,364.17 ; v1@2613.51,486.55 ccw(c2602.42,475.45) 2602.42,491.14 ccw(c2602.42,506.83) v1@2613.51,495.74 ; v1@2618.11,497.64 ccw(c2618.11,513.33) 2629.21,502.24 ccw(c2640.3,491.14) v1@2624.61,491.14 ; v1@2652.88,586.94 cw(c2641.79,575.84) 2657.48,575.84 cw(c2673.17,575.84) v1@2662.08,586.94
  Bottom Layer w15: v1(3310.04,1740.16) 3461.61,1740.16 v1(3465.55,1736.22) ; 3443.98,1740.16 cw(c3443.98,1714.64) v1@3462.02,1732.68
  Bottom Layer w20: v1(3022.64,1134.84) v1(3112.2,1134.84)
  Bottom Layer w35: v1(48.23,818.9) 48.23,1058.7 154.88,1165.35 v1(321.85,1165.35) 321.85,1369.09 v1(322.83,1370.08) ; 321.85,1223.43 543.31,1223.43 v1(606.3,1160.43) ; v1(1082.68,1056.1) 1224.92,1056.1 v1(1235,1046.02) ; 1222.74,1056.1 cw(c1222.74,1033.76) v1@1238.54,1049.56 ; P4.2@1253.7,2160 1324.02,2230.31 1643.39,2230.31 P5.3@1713.7,2160 ; v1(1273.62,1544.29) 1417.32,1544.29 v1(1492.13,1469.49) ; v1@1489.09,1275.59 ccw(c1510.29,1275.59) 1495.3,1260.6 ; v1(1494.09,1275.59) 1494.09,1261.81 v1(1584.65,1171.26) ; v1(1862.2,187.99) 1953.74,187.99 v1(1994.09,228.35) ; v1(2238.19,1322.83) 2338.58,1222.44 v1(2500,1222.44) ; v1(2658.46,1124.02) 2682.09,1147.64 v1(2823.82,1147.64)
  other v2: 3520.67,290.35 3517.72,405.51 3517.72,523.62 3526.57,703.74 2018.7,1072.83 2130.91,1072.83 2289.37,1075.79 2389.76,1075.79 2041.34,1712.6 2167.32,1719.49 1948.82,1835.63 2046.26,1835.63 2152.56,1840.55 812.01,1856.3 90.55,1883.86 817.91,1988.19 84.65,2038.39 248.03,2038.39 821.85,2125.98 822.83,2248.03 673.23,2250 533.46,2251.97 383.86,2254.92 2235.24,2265.75 2145.67,2267.72 2340.55,2267.72 2440.94,2267.72 2576.77,2267.72
LASER-CON: P3.2 R22.1 U4.7 U4.8 | length 615
  Top Layer w35: P3.2@850,100 977.01,227.01 R22.1@977.01,389.69 997.01,409.69 U4.8@997.01,551.57 U4.7@947.01,551.57 ; R22.1@977.43,391.23 ccw(c930.17,438.49) 997.01,438.49
NetC7_1: C7.1 IC1.5 | length 374.9
  Top Layer w12: IC1.5@1534.48,659.69 1635.32,659.69 C7.1@1660,635 ; 1572.12,659.69 cw(c1572.12,549.09) C7.1@1650.32,627.29 ; 1601.09,659.69 cw(c1601.09,578.06) C7.1@1658.81,635.78 ; 1630.06,659.69 cw(c1630.06,607.03) C7.1@1667.29,644.26 ; 1636.3,658.7 ccw(c1656.15,678.55) C7.1@1658.74,650.6 ; 1638.03,656.97 cw(c1618.03,636.97) C7.1@1646.32,636.97
NetC7_2: C7.2 IC1.4 | length 198.6
  Top Layer w12: IC1.4@1534.48,640 1578.5,640 1653.5,565 C7.2@1660,565 ; 1622.19,596.32 ccw(c1660,634.13) C7.2@1660,580.65
NetC9_1: C9.1 IC2.5 | length 232.6
  Top Layer w12: IC2.5@2274.48,659.69 2384.69,659.69 C9.1@2400,675 ; 2334.74,659.69 ccw(c2334.74,738.29) C9.1@2390.32,682.71 ; 2363.71,659.69 ccw(c2363.71,709.32) C9.1@2398.81,674.22
NetC9_2: C9.2 IC2.4 | length 191.9
  Top Layer w12: IC2.4@2274.48,640 2365,640 C9.2@2400,605 ; 2373.28,631.72 ccw(c2400,658.44) C9.2@2400,620.65 ; 2378.03,626.97 cw(c2358.03,606.97) C9.2@2386.32,606.97
NetC11_2: C11.2 IC1.6 | length 227.5
  Top Layer w12: IC1.6@1534.48,679.37 1624.37,679.37 C11.2@1685,740 ; 1658.28,713.28 ccw(c1631.56,740) C11.2@1669.35,740 ; 1663.03,718.03 cw(c1683.03,698.03) C11.2@1683.03,726.31
NetC12_2: C12.2 IC2.6 | length 279.2
  Top Layer w12: IC2.6@2274.48,679.37 2317.16,679.37 2357.79,720 C12.2@2485,720 ; C12.2@2473.36,710.32 ccw(c2449.99,686.96) 2449.99,720 ccw(c2449.99,753.04) C12.2@2473.36,729.68
NetC13_2: C13.2 IC1.8 | length 245.4
  Top Layer w12: IC1.8@1499.05,734.49 1535.43,770.87 1535.43,829.57 C13.2@1505,860 ; IC1.8@1499.05,739.13 ccw(c1499.05,750.32) 1506.97,742.4 ; IC1.8@1499.05,751.13 ccw(c1499.05,791.29) 1527.45,762.89 ; C13.2@1506.97,846.31 cw(c1506.97,818.03) 1526.97,838.03 ; C13.2@1520.65,860 ccw(c1558.44,860) 1531.72,833.28
NetC14_2: C14.2 IC2.8 | length 204.7
  Top Layer w12: IC2.8@2239.05,734.49 2239.05,794.05 C14.2@2305,860 ; 2278.28,833.28 ccw(c2251.56,860) C14.2@2289.35,860 ; 2283.03,838.03 cw(c2303.03,818.03) C14.2@2303.03,846.32
NetC15_1: C15.1 D3.2 L1.2 U3.1 | length 1661.1
  Top Layer w20: U3.1@563.46,1723.9 620.83,1781.26 D3.2@620.83,1890.63 668.46,1842.99 C15.1@668.46,1640.79 830.98,1640.79 L1.2@905.83,1715.63 ; U3.1@563.46,1736.22 ccw(c563.46,1765.97) 584.5,1744.93 ; U3.1@563.46,1756.22 ccw(c563.46,1834.25) 618.64,1779.07 ; D3.2@614.2,1870.22 cw(c483.2,1739.22) 668.46,1739.22 ; D3.2@628.34,1884.37 cw(c531.48,1787.5) 668.46,1787.5 ; D3.2@628.57,1848.52 cw(c641.27,1802.02) 675.35,1836.1 ; D3.2@641.59,1856.08 ccw(c691.73,1805.94) 620.83,1805.94 ccw(c549.92,1805.94) 600.06,1856.08 cw(c434.91,1690.94) 668.46,1690.94 ; D3.2@642.49,1898.51 cw(c579.77,1835.79) 668.46,1835.79 ; D3.2@650.2,1876.85 ccw(c687.84,1876.85) 661.22,1850.24 ; C15.1@661.62,1649.6 ccw(c645.08,1666.14) 668.46,1666.14 ccw(c691.85,1666.14) C15.1@675.31,1649.6 ; C15.1@675.31,1633.94 cw(c691.85,1617.4) 691.85,1640.79 cw(c691.85,1664.17) C15.1@675.31,1647.63 ; L1.2@843.86,1684.35 cw(c824.28,1669.15) 841.81,1651.61 cw(c874.37,1619.05) L1.2@879.02,1664.87
NetC15_2: C15.2 U3.8 | length 208.3
  Top Layer w20: U3.8@563.46,1487.68 640.23,1487.68 668.46,1515.91 C15.2@668.46,1570.79 ; C15.2@661.62,1561.97 cw(c645.08,1545.44) 668.46,1545.44 cw(c691.85,1545.44) C15.2@675.31,1561.97
NetC17_2: C17.2 U2.5 | length 247.4
  Top Layer w15: 3183.38,1761.62 cw(c3165.01,1743.25) C17.2@3190.89,1741.04 ; 3184.36,1778.28 ccw(c3241.31,1778.28) C17.2@3201.04,1738.01 ; U2.5@3184.36,1814.49 ccw(c3277.53,1814.49) C17.2@3211.65,1748.62 ; U2.5@3184.36,1819 3184.36,1760.64 C17.2@3205,1740 ; C17.2@3185.59,1759.41 ccw(c3203.03,1776.85) C17.2@3203.03,1752.18
NetC18_1: C18.1 U2.15 | length 631.2
  Top Layer w15: U2.15@3209.95,2126.09 3209.95,2067.61 3340,1937.56 C18.1@3340,1595 ; C18.1@3331.38,1605.59 ccw(c3310.58,1626.39) 3340,1626.39 ccw(c3369.42,1626.39) C18.1@3348.62,1605.59
NetC21_2: C21.2 U2.9 Y1.1 | length 810.6
  Top Layer w15: C21.2@2758.15,2007.48 2877.36,2007.48 2903.46,1981.38 Y1.1@2903.46,1942.76 3145.83,1942.76 3193.9,1894.68 3253.94,1894.68 3286.72,1861.9 U2.9@3286.72,1819 ; C21.2@2766.77,1998.86 cw(c2787.57,1978.06) 2787.57,2007.48 cw(c2787.57,2036.9) C21.2@2766.77,2016.1 ; Y1.1@2893.21,1953.01 ccw(c2868.46,1977.76) 2903.46,1977.76 ccw(c2938.47,1977.76) Y1.1@2913.72,1953.01 ; Y1.1@2935.72,1932.5 cw(c2960.47,1907.75) 2960.47,1942.76 cw(c2960.47,1977.76) Y1.1@2935.72,1953.01
NetC22_1: C22.1 U3.3 | length 398.3
  Top Layer w15: 463.46,1795.16 v1@471.46,1803.15 ; C22.1@565.51,1982.84 C22.1@565.51,2001.85
  Top Layer w20: U3.3@463.46,1723.9 463.46,1795.16 ; 463.46,1776.43 cw(c500.15,1776.43) v1@474.21,1802.37 ; v1(491.14,1908.46) C22.1@565.51,1982.84 ; 536.92,1954.25 ccw(c491.29,1999.88) C22.1@555.83,1999.88
  Bottom Layer w20: v1(472.44,1804.13) 491.14,1822.83 v1(491.14,1908.46)
NetC22_2: C22.2 R23.2 | length 172.4
  Top Layer w15: R23.2@485.51,2071.85 C22.2@565.51,2071.85 ; R23.2@494.13,2063.24 cw(c514.93,2042.43) 514.93,2071.85 cw(c514.93,2101.27) R23.2@494.13,2080.47 ; C22.2@556.9,2063.24 ccw(c536.1,2042.43) 536.1,2071.85 ccw(c536.1,2101.27) C22.2@556.9,2080.47
NetC23_2: C23.2 U2.10 Y1.2 | length 855.3
  Top Layer w15: C23.2@2758.15,2097.48 2878.9,2097.48 2903.46,2122.05 Y1.2@2903.46,2142.76 2989.13,2142.76 3208.66,1923.23 3267.72,1923.23 3312.31,1878.63 U2.10@3312.31,1819 ; C23.2@2766.77,2088.86 cw(c2787.57,2068.06) 2787.57,2097.48 cw(c2787.57,2126.9) C23.2@2766.77,2106.1 ; Y1.2@2935.72,2132.5 cw(c2960.47,2107.75) 2960.47,2142.76 cw(c2960.47,2177.76) Y1.2@2935.72,2153.01
NetC28_1: C28.1 D4.2 L2.2 U6.1 | length 1100
  Top Layer w20: 1701.5,1614.88 cw(c1775.16,1541.22) D4.2@1775.16,1645.39 ; 1734.76,1648.15 ccw(c1708.15,1674.76) D4.2@1745.79,1674.76 ; 1735.64,1649.02 cw(c1775.16,1609.51) D4.2@1775.16,1665.39 ; 1767.11,1465.13 ccw(c1787.01,1485.02) 1787.01,1456.89 ccw(c1787.01,1485.02) 1806.9,1465.13 ; C28.1@1771.87,1460.38 cw(c1758.69,1447.21) C28.1@1777.32,1447.21 ; D4.2@1775.16,1688.54 1695.16,1608.55 U6.1@1695.16,1506.65 1725.59,1506.65 C28.1@1787.01,1445.24 1897.01,1555.24 ; C28.1@1796.69,1447.21 cw(c1815.32,1447.21) C28.1@1802.15,1460.38 ; L2.2@1966.02,1522.74 ccw(c1897.01,1465.72) 1897.01,1555.24 ; L2.2@1966.02,1587.73 cw(c1897.01,1644.75) 1897.01,1555.24 ; L2.2@1981.44,1535.48 ccw(c1939.48,1500.81) 1939.48,1555.24 ccw(c1939.48,1609.66) L2.2@1981.44,1575 ; L2.2@2027.01,1555.24 1897.01,1555.24
NetC28_2: C28.2 U6.8 | length 299.5
  Top Layer w15: U6.8@1695.16,1270.43 1787.01,1362.28 C28.2@1787.01,1375.24 ; U6.8@1695.16,1275.26 ccw(c1695.16,1286.9) U6.8@1703.39,1278.67 ; U6.8@1695.16,1290.26 ccw(c1695.16,1338.11) 1729,1304.27 ; U6.8@1695.16,1305.26 ccw(c1695.16,1389.33) 1754.6,1329.88 ; 1758.44,1333.71 ccw(c1718.89,1373.27) C28.2@1774.82,1373.27
NetC29_1: C29.1 Q1.2 R30.1 U5.7 | length 903.7
  Top Layer w15: C29.1@2580.9,1272.76 2650.91,1272.76 R30.1@2660.91,1262.76 2762.76,1262.76 Q1.2@2800,1300 ; C29.1@2589.52,1264.14 cw(c2610.32,1243.34) 2610.32,1272.76 cw(c2610.32,1302.17) C29.1@2589.52,1281.37 ; 2612.1,1272.76 cw(c2612.1,1215.92) R30.1@2652.29,1256.11 ; R30.1@2669.52,1254.14 cw(c2690.32,1233.34) 2690.32,1262.76 cw(c2690.32,1292.17) R30.1@2669.52,1271.37 ; U5.7@2960.51,1072.28 3034.88,1072.28 v1(3035.43,1072.83) ; 3022.03,1072.28 ccw(c3022.03,1086.24) v1@3031.9,1076.37
  Bottom Layer w15: Q1.2@2800,1300 2839.76,1300 2879.92,1259.84 2879.92,1228.35 v1(3035.43,1072.83) ; Q1.2@2822,1285.5 cw(c2822,1207.61) 2877.08,1262.69 ; Q1.2@2822,1300.5 cw(c2822,1258.82) 2851.47,1288.29
NetC31_1: C31.1 Q1.1 R30.2 U5.8 | length 783.2
  Top Layer w15: C31.1@2580.9,1182.76 2650.91,1182.76 R30.2@2660.91,1192.76 2753.66,1100 Q1.1@2800,1100 2859.21,1040.79 U5.8@2960.51,1040.79 ; C31.1@2589.52,1174.14 cw(c2610.32,1153.34) 2610.32,1182.76 cw(c2610.32,1212.17) C31.1@2589.52,1191.37 ; 2612.1,1182.76 ccw(c2612.1,1239.59) R30.2@2652.29,1199.4 ; R30.2@2660.91,1178.6 cw(c2660.91,1144.43) 2685.07,1168.59 ; R30.2@2673.09,1190.79 ccw(c2697.76,1190.79) R30.2@2680.32,1173.35 ; 2711.7,1141.96 ccw(c2778,1208.26) Q1.1@2778,1114.5 ; 2737.31,1116.36 ccw(c2778,1157.05) Q1.1@2778,1099.5 ; Q1.1@2821.52,1100.12 ccw(c2851.64,1092.35) 2829.64,1070.36 ; Q1.1@2836.04,1096.38 ccw(c2881.16,1084.74) 2848.21,1051.79
NetC33_1: C33.1 U6.3 | length 442.3
  Top Layer w20: v1(1576.77,1574.8) 1595.16,1556.42 U6.3@1595.16,1506.65 ; v1@1578.45,1573.12 cw(c1542.5,1537.17) U6.3@1593.35,1537.17 ; v1(1627.95,1668.31) 1700.16,1740.51 C33.1@1700.16,1813.54 ; C33.1@1693.31,1804.73 cw(c1676.78,1788.19) 1700.16,1788.19 cw(c1723.54,1788.19) C33.1@1707.01,1804.73
  Bottom Layer w20: v1(1576.77,1574.8) 1627.95,1625.98 v1(1627.95,1668.31)
NetC33_2: C33.2 R34.2 | length 173.5
  Top Layer w20: R34.2@1600.16,1883.54 C33.2@1700.16,1883.54 ; R34.2@1607.01,1876.7 cw(c1623.54,1860.16) 1623.54,1883.54 cw(c1623.54,1906.93) R34.2@1607.01,1890.39 ; C33.2@1693.31,1876.7 ccw(c1676.78,1860.16) 1676.78,1883.54 ccw(c1676.78,1906.93) C33.2@1693.31,1890.39